# Altium PCB HTMD-PREAMP2.PcbDoc (part 2 of 2)
Units mm, origin at the board's own origin, x right, y up, seen from the top; angles counter-clockwise.
Board outline 220 x 58 mm, 8 copper layers (Top Layer, GND1, S2, POWER1, GND2, S3, POWER2, Bottom Layer); 267 components, 129 nets, 701 pads, 82 vias.
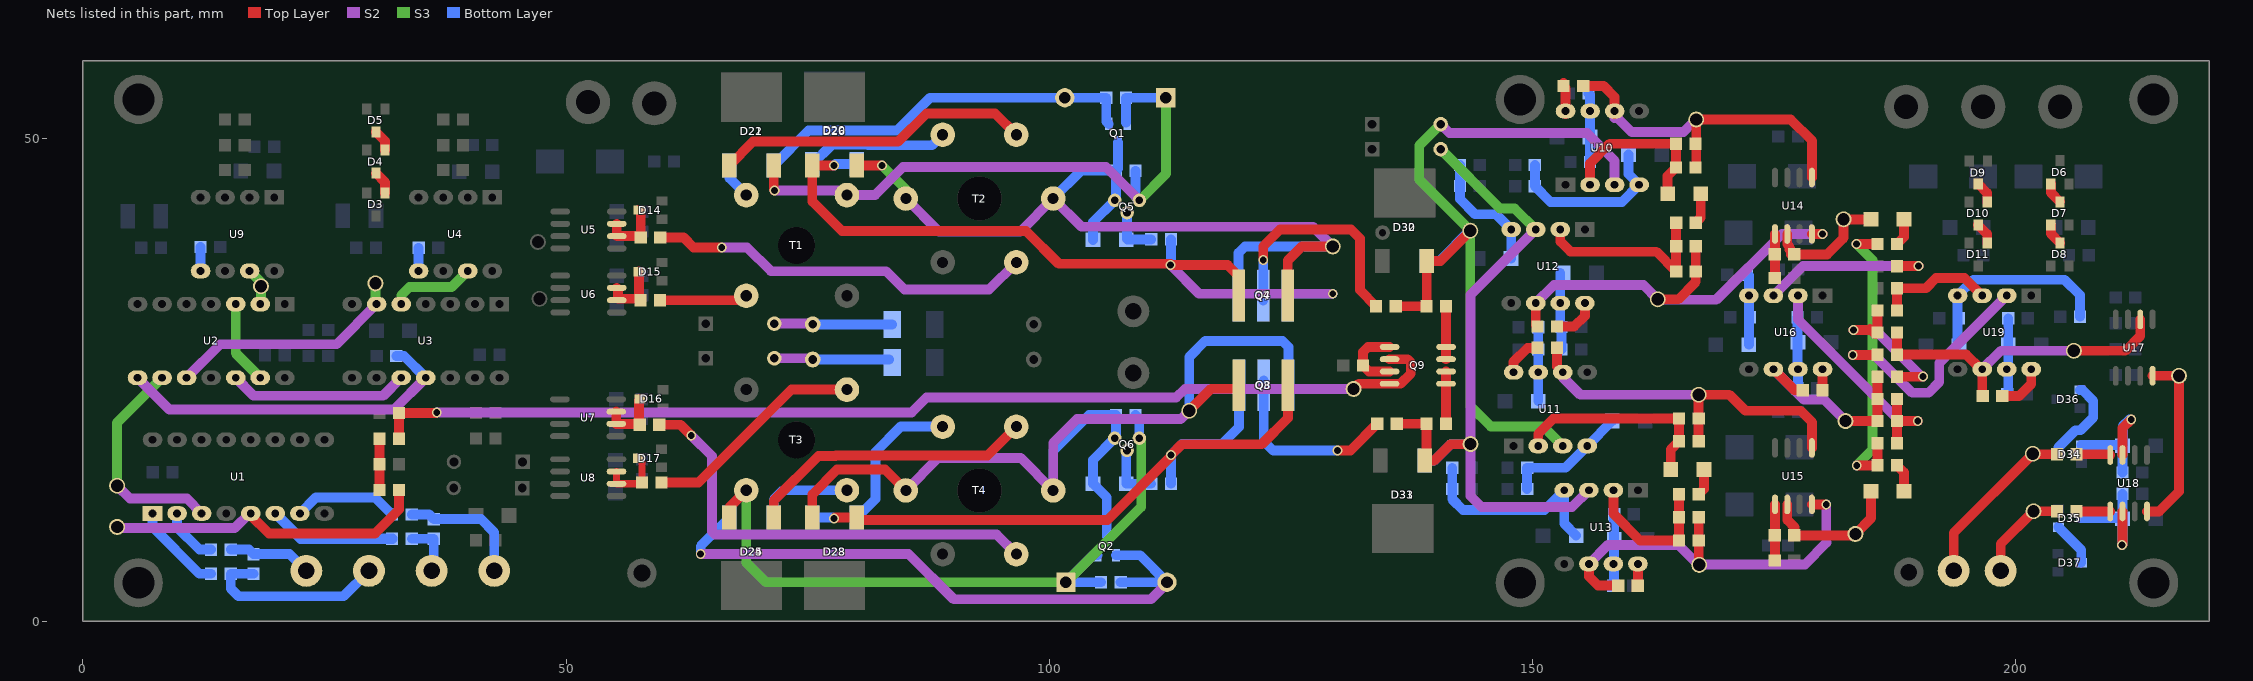
[diagram p8: the nets of this part, all layers, seen from the top]

## Via types
v1: diameter 1.016, hole 0.711, Top Layer to Bottom Layer, 81 vias
v2: diameter 1.017, hole 0.711, Top Layer to Bottom Layer, 1 vias

## Nets (pads, with @x,y where several pads share a name; then routed paths per layer and width w, separated by ;. In a path a pad name is that pad's centre, name@x,y a point inside that pad or via, vN(x,y) a via of type N, cw(c..) or ccw(c..) an arc to the next point about the centre after c; other vN are vias at no path point) (continued)
NetC34_1: C34.1 D24.2 D29.1 Q2.2 Q6.3 R26.2 T3.1 | length 73.9
  Top Layer w1.016: D24.2@66.888,10.743 66.888,11.813 T3.1@68.643,13.568
  S3 w1.016: T3.1@68.643,13.568 68.643,6.082 70.675,4.05 D29.1@101.715,4.05 109.502,11.837 109.502,18.96 Q6.3@109.31,18.96
  Bottom Layer w1.016: Q2.2@104.996,6.85 104.515,6.85 D29.1@101.715,4.05 R26.2@105.343,4.05 ; C34.1@108.925,21.35 109.31,20.965 Q6.3@109.31,18.96
NetC34_2: C34.2 C38.1 D28.2 Q2.3 Q3.3 Q6.1 Q8.3 T4.2 T4.5 TP8.1 | length 104.2
  Top Layer w1.016: D28.2@75.475,10.743 75.475,13.15 78.025,15.7 83.005,15.7 T4.5@85.155,13.55 ; TP8.1@114.475,21.8 116.75,24.075 118.842,24.075
  S2 w1.016: T4.5@85.155,13.55 88.5,16.895 97.05,16.895 T4.2@100.395,13.55 100.395,18.445 102.875,20.925 113.6,20.925 TP8.1@114.475,21.8
  Bottom Layer w1.016: T4.2@100.395,13.55 100.395,17.645 104.1,21.35 C34.2@106.893,21.35 106.893,19.083 Q6.1@106.77,18.96 104.525,16.715 C38.1@104.525,14.25 105.946,12.829 Q2.3@105.946,8.75 ; TP8.1@114.475,21.8 114.475,27.35 116.125,29 124.125,29 124.75,28.375 Q8.3@124.75,24.957
NetC35_1: C35.1 D21.2 D27.1 Q1.2 Q5.3 R25.2 T1.1 | length 64.9
  Top Layer w1.016: D21.2@71.488,47.182 71.488,44.662 v1(71.575,44.575)
  S2 w1.016: v1(71.575,44.575) 78.589,44.575 T1.1@79.057,44.107 81.982,44.107 84.875,47 105.87,47 Q5.3@109.31,43.56
  S3 w1.016: Q5.3@109.31,43.56 112.06,46.31 D27.1@112.06,54.175
  Bottom Layer w1.016: Q1.2@107.925,51.6 R25.2@107.925,54.175 D27.1@112.06,54.175 ; C35.1@108.925,46.625 108.925,43.945 Q5.3@109.31,43.56
NetC35_2: C35.2 C37.1 D26.2 Q1.3 Q4.3 Q5.1 Q7.3 T2.2 T2.5 TP7.1 | length 99.3
  Top Layer w1.016: D26.2@80.075,47.182 v1@82.668,47.182 ; Q4.3@124.665,33.225 124.665,37.34 126.118,38.793 TP7.1@129.325,38.793
  S2 w1.016: T2.5@85.155,43.75 88.555,40.35 96.995,40.35 T2.2@100.395,43.75 103.317,40.828 127.29,40.828 TP7.1@129.325,38.793
  S3 w1.016: v1(82.675,47.175) 85.155,44.695 T2.5@85.155,43.75
  Bottom Layer w1.016: T2.2@100.395,43.75 103.27,46.625 C35.2@106.893,46.625 ; C37.1@104.525,39.475 104.525,41.315 Q5.1@106.77,43.56 106.893,43.683 C35.2@106.893,46.625 ; Q1.3@107.1,49.575 107.1,46.832 C35.2@106.893,46.625 ; Q7.3@119.585,33.181 119.585,38.135 120.243,38.793 TP7.1@129.325,38.793
NetC36_1: C36.1 R27.2 R30.1 | length 5.3
  Top Layer w1.016: R27.2@30.693,13.6 C36.1@30.693,16.25 R30.1@30.693,18.9
NetC37_2: C37.2 Q5.2 R28.2 | length 5.2
  Bottom Layer w1.016: Q5.2@108.04,42.29 108.04,39.561 108.076,39.525 R28.2@110.543,39.525
NetC38_2: C38.2 Q6.2 R29.2 | length 5.9
  Bottom Layer w1.016: Q6.2@107.954,17.604 C38.2@107.954,14.25 R29.2@110.543,14.25
NetC39_1: C39.1 R37.1 | length 3.2
  Top Layer w1.016: R37.1@166.882,41.25 167.4,41.768 C39.1@167.4,44.25
NetC39_2: C39.2 C52.2 R41.2 U10.2 | length 17.5
  Top Layer w1.016: U10.2@155.945,45.175 155.945,47.395 157.975,49.425 C52.2@164.825,49.425 R41.2@164.825,46.95 163.971,46.096 C39.2@163.971,44.25
NetC40_1: C40.1 R38.1 | length 2.8
  Top Layer w1.016: R38.1@167.182,13.15 167.725,13.693 C40.1@167.725,15.725
NetC40_2: C40.2 C53.2 R42.2 U11.2 | length 22.1
  Top Layer w1.016: U11.2@150.577,18.158 150.577,19.402 152.175,21 R42.2@165.15,21 C53.2@165.15,18.65 164.296,17.796 C40.2@164.296,15.725
NetC41_2: C41.2 C42.2 R46.1 U12.4 | length 13.1
  Bottom Layer w1.016: C42.2@142.485,47.225 R46.1@142.485,45.05 142.485,43.69 144.05,42.125 146.205,42.125 U12.4@147.785,40.545 C41.2@147.785,37.56
NetC43_2: C43.2 C48.2 R47.1 U11.4 | length 13
  Bottom Layer w1.016: R47.1@149.432,13.7 C43.2@149.432,15.9 153.399,15.9 U11.4@155.657,18.158 155.665,18.158 C48.2@158.232,20.725
NetC44_2: C44.2 C45.1 R48.1 U13.4 | length 21.4
  Bottom Layer w1.016: C45.1@141.685,15.9 R48.1@141.685,13.7 141.685,12.64 142.8,11.525 151.233,11.525 U13.4@153.278,13.57 153.278,10.101 C44.2@154.504,8.875
NetC46_2: C46.2 C47.2 R45.1 U10.4 | length 18
  Bottom Layer w1.016: C46.2@150.232,47.225 R45.1@150.232,45.025 151.857,43.4 159.25,43.4 U10.4@161.025,45.175 159.921,46.279 C47.2@159.921,48.3
NetC49_1: C49.1 R37.2 R39.1 U12.2 | length 19.6
  Top Layer w1.016: U12.2@152.865,40.545 152.865,39.285 153.9,38.25 162.8,38.25 C49.1@164.85,36.2 R39.1@164.85,38.8 R37.2@164.85,41.25
NetC49_2: C49.2 C61.1 R39.2 TP15.1 U12.6 U14.8 | length 45.6
  Top Layer w1.016: C61.1@150.325,30.675 U12.6@150.325,32.925 ; TP15.1@162.95,33.325 165.075,33.325 166.882,35.132 C49.2@166.882,36.2 R39.2@166.882,38.8 ; U14.8@178.891,40.083 v1(179.992,40.083)
  S2 w1.016: U12.6@150.325,32.925 152.2,34.8 161.475,34.8 TP15.1@162.95,33.325 163,33.275 169,33.275 175.808,40.083 v1(179.992,40.083)
NetC50_1: C50.1 R38.2 R40.1 U13.2 | length 15.1
  Top Layer w1.016: U13.2@158.358,13.57 158.358,11.142 161.125,8.375 R40.1@165.15,8.375 C50.1@165.15,10.775 R38.2@165.15,13.15
NetC50_2: C50.2 C62.1 R40.2 TP14.1 U13.6 U15.8 | length 42.2
  Top Layer w1.016: U13.6@155.818,5.95 155.818,4.632 156.75,3.7 C62.1@158.853,3.7 ; TP14.1@167.182,5.9 R40.2@167.182,8.375 C50.2@167.182,10.775 ; U15.8@178.891,12.106 v1@180.294,12.106
  S2 w1.016: U13.6@155.818,5.95 157.775,7.907 165.093,7.907 167.1,5.9 178.175,5.9 180.425,8.15 180.375,8.2 v1(180.375,12.1)
NetC51_1: C51.1 C54.2 R49.1 U12.7 | length 7.8
  Bottom Layer w1.016: R49.1@152.865,30.575 U12.7@152.865,32.925 C54.2@152.865,36.05 ; C51.1@152.99,28.125 R49.1@152.99,30.45
NetC52_1: C52.1 C63.1 R41.1 TP12.1 U10.6 U14.1 | length 37.2
  Top Layer w1.016: C63.1@155.225,55.395 157.355,55.395 158.485,54.265 U10.6@158.485,52.495 ; R41.1@166.925,47.018 TP12.1@166.925,51.925 176.7,51.925 178.891,49.734 U14.1@178.891,45.925
  S2 w1.016: U10.6@158.485,52.09 U10.6@158.485,52.495 ; U10.6@158.485,52.39 160.25,50.625 165.625,50.625 TP12.1@166.925,51.925
NetC53_1: C53.1 C64.1 R42.1 TP13.1 U11.6 U15.1 | length 38.4
  Top Layer w1.016: C64.1@152.532,28.3 152.532,26.363 U11.6@153.117,25.778 ; C53.1@167.175,18.657 TP13.1@167.175,23.45 170.35,23.45 172,21.8 177.701,21.8 178.891,20.61 U15.1@178.891,17.948
  S2 w1.016: U11.6@153.117,25.778 153.117,25.258 154.925,23.45 TP13.1@167.175,23.45
NetC55_2: C55.2 C56.1 R50.1 U13.7 | length 7.3
  Bottom Layer w1.016: R50.1@158.435,3.792 C55.2@158.435,8.469 C56.1@158.435,11.094
NetC57_1: C57.1 C58.1 R43.1 U10.7 | length 7.2
  Bottom Layer w1.016: R43.1@155.777,54.625 155.945,54.457 U10.7@155.945,52.795 C57.1@155.945,50.123 155.943,50.121 C58.1@155.943,47.523
NetC59_1: C59.1 C60.1 R44.1 U11.7 | length 7.7
  Bottom Layer w1.016: C59.1@150.577,22.775 C60.1@150.577,28.125 R44.1@150.577,30.425
NetC61_2: C61.2 U12.8 | length 4.7
  Top Layer w1.016: C61.2@152.532,30.5 154.3,30.5 155.405,31.605 U12.8@155.405,32.925
NetC62_2: C62.2 U13.8 | length 2.3
  Top Layer w1.016: C62.2@160.885,3.7 160.898,3.713 U13.8@160.898,5.95
NetC63_2: C63.2 U10.8 | length 3
  Top Layer w1.016: C63.2@153.193,55.395 153.405,55.183 U10.8@153.405,52.495
NetC64_2: C64.2 U11.8 | length 4.1
  Top Layer w1.016: U11.8@148.037,25.778 148.037,26.862 149.475,28.3 C64.2@150.5,28.3
NetC73_1: C73.1 R55.1 | length 2.8
  Top Layer w1.016: R55.1@187.707,39.046 188.429,39.768 C73.1@188.429,41.596
NetC73_2: C73.2 R53.2 TP16.1 U14.6 | length 13.5
  Top Layer w1.016: U14.6@176.351,40.083 176.351,39.049 cw(c175.05,37.975) R53.2@176.69,38.367 ; R53.2@176.575,38.482 R53.2@176.69,38.367 ; R53.2@176.737,37.975 ccw(c175.05,37.975) R53.2@176.69,38.367 ; C73.2@185,41.596 182.179,41.596 182.179,39.705 182.099,39.624 182.099,39.599 180.475,37.975 R53.2@177.082,37.975 R53.2@176.69,38.367
NetC74_1: C74.1 R56.1 | length 3
  Top Layer w1.016: R56.1@187.707,16.146 188.429,15.424 C74.1@188.429,13.471
NetC74_2: C74.2 R54.2 TP23.1 U15.6 | length 15
  Top Layer w1.016: U15.6@176.351,12.106 176.351,10.474 177.082,9.743 R54.2@177.082,8.9 183.25,8.9 TP23.1@183.4,9.05 185.025,10.675 C74.2@185.025,13.446
NetC77_2: C77.2 C78.2 R57.1 U16.4 | length 7.2
  Bottom Layer w1.016: R57.1@172.373,35.775 172.373,33.305 C78.2@172.374,28.625
NetC81_1: C81.1 C83.1 C85.2 R58.2 TP19.1 U16.6 | length 21.5
  Top Layer w1.016: U16.6@174.914,26.085 177.073,23.925 C83.1@177.962,23.925 ; TP19.1@182.375,20.725 C81.1@185.675,20.726 ; C81.1@185.675,20.726 R58.2@185.675,23.016 C85.2@185.675,25.306
  S2 w1.016: U16.6@174.914,26.085 178.048,22.95 180.15,22.95 TP19.1@182.375,20.725
NetC81_2: C81.2 R58.1 R67.2 U16.2 | length 26
  Top Layer w1.016: R67.2@187.707,18.436 C81.2@187.707,20.726 ; R58.1@187.707,23.016 C81.2@187.707,20.726 ; v1(189.851,20.726) C81.2@187.707,20.726
  S2 w1.016: U16.2@177.454,33.705 177.454,31.221 187.949,20.726 v1(189.851,20.726)
NetC82_1: C82.1 C84.1 R59.1 U16.7 | length 7.2
  Bottom Layer w1.016: U16.7@177.4,26.138 C82.1@177.4,31.475 ; R59.1@177.454,24.179 U16.7@177.454,26.085
NetC83_2: C83.2 U16.8 | length 2.2
  Top Layer w1.016: C83.2@179.994,23.925 U16.8@179.994,26.085
NetC85_1: C85.1 C97.1 R72.1 | length 17
  Top Layer w1.016: v1(183.2,30.15) 184.836,30.15 184.938,30.251 185.489,29.7 R72.1@185.675,29.886 C97.1@185.675,32.176 ; C85.1@187.707,25.306 190.356,25.306 v1(190.4,25.35)
  S2 w1.016: v1(183.2,30.15) 185.45,30.15 190.25,25.35 v1(190.4,25.35)
NetC86_2: C86.2 C87.2 R61.1 U19.4 | length 21.3
  Bottom Layer w1.016: C87.2@193.974,28.671 U19.4@193.974,33.705 195.619,35.35 205.05,35.35 206.625,33.775 R61.1@206.625,31.525
NetC88_1: C88.1 C89.1 D34.2 U18.3 | length 14.4
  Top Layer w1.016: U18.3@211.033,17.216 211.033,19.999 v1(211.935,20.901)
  Bottom Layer w1.016: D34.2@206.775,18.246 C88.1@211.082,18.246 ; C89.1@211.033,15.396 C88.1@211.033,18.171 211.095,18.232 211.095,20.245 211.751,20.901 v1(211.935,20.901)
NetC90_2: C90.2 C91.1 D35.3 U18.6 | length 13
  Top Layer w1.016: v1(210.975,7.9) 211.033,7.958 U18.6@211.033,11.374
  Bottom Layer w1.016: D35.3@206.775,10.696 210.958,10.696 C91.1@211.033,10.621 ; v1@211.033,7.958 C91.1@211.033,10.621 ; C90.2@211.033,13.196 C91.1@211.033,10.621
NetC93_1: C93.1 C95.1 R65.1 U19.7 | length 7.8
  Bottom Layer w1.016: R65.1@199.204,23.596 C95.1@199.204,28.596 C93.1@199.204,31.371
NetC94_2: C94.2 U19.8 | length 5
  Top Layer w1.016: C94.2@198.596,23.321 200.346,23.321 201.594,24.569 U19.8@201.594,26.085
NetC97_2: C97.2 R71.2 U19.3 | length 12.3
  Top Layer w1.016: C97.2@187.707,32.176 R71.2@187.707,34.466 190.691,34.466 191.75,35.525 194.693,35.525 U19.3@196.514,33.705
NetD1_1: D1.1 R5.2 R7.2 | length 11.8
  S2 w1.016: D1.1@71.551,27.226 R5.2@75.399,27.226
  Bottom Layer w1.016: R5.2@75.525,27.1 R7.2@83.44,27.1
NetD2_1: D2.1 R6.2 R8.2 | length 12.1
  S2 w1.016: D2.1@71.551,30.805 R6.2@75.449,30.805
  Bottom Layer w1.016: R6.2@75.525,30.729 R8.2@83.74,30.729
NetD3_2: D3.2 D4.3 | length 2.4
  Top Layer w1.016: D4.3@30.329,46.375 31.269,45.435 D3.2@31.269,44.338
NetD4_2: D4.2 D5.3 | length 2.3
  Top Layer w1.016: D5.3@30.329,50.637 31.269,49.698 D4.2@31.269,48.762
NetD6_2: D6.2 D7.3 | length 2.3
  Top Layer w1.016: D6.2@203.62,45.275 203.62,44.352 D7.3@204.56,43.413
NetD7_2: D7.2 D8.3 | length 2.3
  Top Layer w1.016: D7.2@203.62,41.025 203.62,40.102 D8.3@204.56,39.163
NetD9_3: D9.3 D10.2 | length 2.2
  Top Layer w1.016: D9.3@196.115,45.25 197.03,44.335 D10.2@197.03,43.4
NetD10_3: D10.3 D11.2 | length 2.2
  Top Layer w1.016: D10.3@196.09,41.013 197.03,40.073 D11.2@197.03,39.163
NetD14_3: D14.3 R19.1 U5.6 U5.7 | length 6.7
  Top Layer w1.016: U5.7@55.242,41.13 U5.6@55.242,39.86 57.583,39.86 R19.1@57.718,39.725 57.718,42.38 D14.3@57.537,42.56
NetD15_3: D15.3 R20.1 U6.6 U6.7 | length 6.1
  Top Layer w1.016: U6.7@55.242,34.505 55.388,34.359 55.388,33.381 57.537,33.381 D15.3@57.537,36.185
NetD16_3: D16.3 R21.1 U7.6 U7.7 | length 6.2
  Top Layer w1.016: U7.7@55.192,21.705 U7.6@55.192,20.435 57.533,20.435 57.533,22.881 D16.3@57.662,23.01
NetD17_3: D17.3 R22.1 U8.6 U8.7 | length 6.6
  Top Layer w0.762: U8.7@55.217,15.505 U8.6@55.217,14.235 57.71,14.235 R22.1@57.85,14.375 57.85,16.523 D17.3@57.487,16.885
NetD18_1: D18.1 D30.1 D32.2 R31.2 R35.1 TP11.1 U10.3 U11.3 | length 85.2
  Top Layer w1.016: R31.2@135.832,32.6 R35.1@139.01,32.6 139.052,32.642 D32.2@139.052,37.28 140.455,37.28 TP11.1@143.65,40.475
  S2 w1.016: D18.1@140.491,51.451 141.417,50.525 155.625,50.525 158.485,47.665 U10.3@158.485,45.175
  S3 w1.016: D18.1@140.491,51.451 138.275,49.235 138.275,45.7 TP11.1@143.55,40.425 143.55,22.3 145.675,20.175 151.1,20.175 U11.3@153.117,18.158
  Bottom Layer w1.016: D30.1@139.052,37.28 140.355,37.28 TP11.1@143.55,40.475
NetD19_1: D19.1 D31.1 D33.2 R32.1 R34.2 TP10.1 U12.3 U13.3 | length 74.8
  Top Layer w1.016: R32.1@135.95,20.45 R34.2@139.01,20.45 139.01,16.806 D31.1@138.852,16.648 139.823,16.648 141.5,18.325 TP10.1@143.55,18.325
  S2 w1.016: U12.3@150.325,40.545 143.575,33.795 TP10.1@143.575,18.35 143.575,12.975 144.725,11.825 154.073,11.825 U13.3@155.818,13.57
  S3 w1.016: D19.1@140.491,48.851 146.617,42.725 148.145,42.725 U12.3@150.325,40.545
  Bottom Layer w1.016: D33.2@138.852,16.648 139.823,16.648 141.5,18.325 TP10.1@143.55,18.325
NetD20_1: D20.1 D26.1 Q4.1 Q7.1 R28.1 | length 82.5
  Top Layer w1.016: v1@77.718,47.182 D26.1@75.475,47.182 75.475,43.45 78.55,40.375 97.6,40.375 100.975,37 v1@112.525,37 ; v1(112.525,36.875) 118.45,36.875 119.585,35.74 Q4.1@119.585,33.725
  S2 w1.016: v1(112.525,36.875) 115.5,33.9 v1(129.325,33.9)
  Bottom Layer w1.016: v1@77.857,47.307 D20.1@80.075,47.307 ; v1@112.575,36.925 R28.1@112.575,39.525 ; Q7.1@124.884,33.9 v1(129.325,33.9)
  other v1: 77.725,47.175
NetD20_2: D20.2 T2.4 | length 14.8
  Bottom Layer w1.016: D20.2@75.475,47.307 77.487,49.319 81.141,49.319 81.203,49.257 87.873,49.257 T2.4@88.965,50.349
NetD21_1: D21.1 T2.3 | length 32.8
  Top Layer w1.016: D21.1@66.888,47.182 69.35,49.645 84.37,49.645 87.275,52.55 94.384,52.55 T2.3@96.585,50.349
NetD22_1: D22.1 D27.2 Q1.1 R25.1 | length 40.1
  Bottom Layer w1.016: D22.1@71.488,47.182 75.08,50.775 84.25,50.775 87.65,54.175 D27.2@101.6,54.175 R25.1@105.893,54.175 105.893,51.732 Q1.1@106.15,51.475
NetD22_2: D22.2 T1.2 | length 3.8
  Bottom Layer w1.016: D22.2@66.888,47.182 66.888,45.862 T1.2@68.643,44.107
NetD23_1: D23.1 D28.1 Q3.1 Q8.1 R29.1 | length 73
  Top Layer w1.016: v1@77.818,10.743 D28.1@80.075,10.743 80.075,10.502 106.002,10.502 v1@112.663,17.163 ; v1(112.6,17.225) 113.7,18.325 121.975,18.325 124.7,21.05 Q3.1@124.7,24.884
  Bottom Layer w1.016: D23.1@75.475,10.743 v1@77.632,10.743 ; R29.1@112.575,14.25 v1@112.575,17.2 ; v1(112.6,17.225) 113.725,18.35 117.875,18.35 119.635,20.11 Q8.1@119.635,24.443
  other v1: 77.725,10.65
NetD23_2: D23.2 T4.4 | length 15.6
  Bottom Layer w1.016: D23.2@80.075,10.743 82,12.668 82,17.525 84.624,20.149 T4.4@88.965,20.149
NetD24_1: D24.1 T4.3 | length 30
  Top Layer w1.016: D24.1@71.488,10.743 71.488,12.488 76.125,17.125 77.869,17.125 77.919,17.175 93.611,17.175 T4.3@96.585,20.149
NetD25_1: D25.1 D29.2 Q2.1 R26.1 | length 67.2
  S2 w1.016: v1(63.925,6.975) 85.425,6.975 90.112,2.288 110.512,2.288 112.175,3.951 D29.2@112.175,4.05
  Bottom Layer w1.016: v1(63.925,6.975) 63.925,7.781 D25.1@66.888,10.743 ; Q2.1@106.896,6.85 109.375,6.85 D29.2@112.175,4.05 R26.1@107.375,4.05
NetD25_2: D25.2 T3.2 | length 9.8
  Bottom Layer w1.016: D25.2@71.488,10.743 71.488,12.588 72.468,13.568 T3.2@79.057,13.568
NetD34_3: D34.3 D36.2 | length 9.1
  Bottom Layer w1.016: D34.3@204.387,17.306 204.387,17.99 206.173,19.775 206.675,19.775 208.007,21.107 208.007,22.8 206.877,23.93 D36.2@206.625,23.93
NetD35_2: D35.2 D37.3 | length 4.7
  Bottom Layer w1.016: D35.2@204.387,9.756 206.763,7.381 D37.3@206.763,6.06
NetQ7_2: Q7.2 R31.1 | length 24.4
  Top Layer w1.016: v1(122.125,37.375) 122.125,38.8 123.875,40.55 131.2,40.55 132.125,39.625 132.125,34.275 R31.1@133.8,32.6
  Bottom Layer w1.016: Q7.2@122.125,33.181 v1(122.125,37.375)
NetQ8_2: Q8.2 R32.2 | length 19.6
  Top Layer w1.016: v1(129.8,17.675) 131.143,17.675 R32.2@133.918,20.45
  Bottom Layer w1.016: Q8.2@122.175,24.944 122.175,18.675 123.2,17.65 123.225,17.675 v1(129.8,17.675)
NetQ9_1: Q9.1 Q9.3 R36.1 | length 7.4
  Top Layer w1.016: Q9.3@135.2,25.86 133.065,25.86 R36.1@132.45,26.475 132.45,27.875 132.975,28.4 Q9.1@135.2,28.4
NetQ9_2: Q9.2 Q9.4 R30.2 R33.2 TP9.1 | length 112.4
  Top Layer w1.016: R30.2@32.725,18.9 R33.2@32.725,21.55 v1@36.55,21.55 ; TP9.1@131.475,24.05 132.015,24.59 Q9.4@135.2,24.59 136.34,24.59 137.4,25.65 137.4,26.8 137.07,27.13 Q9.2@135.2,27.13
  S2 w1.016: v1(36.625,21.625) 36.645,21.605 85.755,21.605 87.3,23.15 113.125,23.15 114.025,24.05 TP9.1@131.475,24.05
NetQ9_5: Q9.5 Q9.6 R34.1 | length 5.4
  Top Layer w1.016: R34.1@141.042,20.45 Q9.5@141.042,24.59 Q9.6@141.042,25.86
NetQ9_7: Q9.7 Q9.8 R35.2 | length 5.5
  Top Layer w1.016: Q9.7@141.042,27.13 R35.2@141.042,32.6
NetR1_2: R1.2 U1.2 | length 5.9
  Bottom Layer w1.016: U1.2@9.755,11.175 9.755,9.745 12.075,7.425 R1.2@13.273,7.425
NetR2_2: R2.2 U1.1 | length 9.5
  Bottom Layer w1.016: U1.1@7.215,11.175 7.215,9.79 12.08,4.925 R2.2@13.273,4.925
NetR3_2: R3.2 U1.6 | length 13.2
  Bottom Layer w1.106: U1.6@19.915,11.175 22.54,8.55 R3.2@32,8.55
NetR4_2: R4.2 U1.7 | length 11
  Bottom Layer w1.016: U1.7@22.455,11.175 24.1,12.82 30.23,12.82 R4.2@32,11.05
NetR9_2: R9.2 U2.8 U3.11 | length 36.5
  S2 w1.016: U2.8@5.66,25.206 8.941,21.925 32.2,21.925 U3.11@35.48,25.206
  Bottom Layer w1.016: R9.2@32.432,27.451 33.235,27.451 U3.11@35.48,25.206
NetR13_1: R13.1 U4.5 | length 2.4
  Bottom Layer w1.016: U4.5@34.747,36.255 R13.1@34.747,38.65
NetR17_1: R17.1 U9.5 | length 2.5
  Bottom Layer w1.016: U9.5@12.18,36.255 R17.1@12.18,38.725
NetR19_2: R19.2 T2.1 | length 40.2
  Top Layer w1.016: R19.2@59.75,39.725 62.175,39.725 63.2,38.7 v1(66.1,38.7)
  S2 w1.016: v1(66.1,38.7) 68.716,38.7 71.183,36.233 83.117,36.233 85.025,34.325 93.759,34.325 T2.1@96.585,37.151
NetR20_2: R20.2 T1.3 | length 9.1
  Top Layer w1.016: R20.2@59.725,33.225 68.175,33.225 T1.3@68.643,33.693
NetR21_2: R21.2 T4.1 | length 47.1
  Top Layer w1.016: R21.2@59.65,20.35 61.85,20.35 v1(62.95,19.25)
  S2 w1.016: v1(62.95,19.25) 65.1,17.1 65.1,9.3 65.417,8.983 94.553,8.983 T4.1@96.585,6.951
NetR22_2: R22.2 T3.3 | length 23.2
  Top Layer w1.016: R22.2@59.882,14.375 63.7,14.375 73.307,23.982 T3.3@79.057,23.982
NetR27_1: R27.1 TP2.1 U1.5 | length 34
  Top Layer w1.016: U1.5@17.375,11.175 17.375,10.975 19.25,9.1 30.25,9.1 32.725,11.575 R27.1@32.725,13.6
  S2 w1.016: TP2.1@3.55,9.774 3.55,9.651 15.72,9.651 17.244,11.175 U1.5@17.375,11.175
NetR51_1: R51.1 R53.1 U14.5 | length 4.5
  Top Layer w1.016: R51.1@175.081,35.556 U14.5@175.081,40.083
NetR52_1: R52.1 R54.1 U15.5 | length 5.8
  Top Layer w1.016: R52.1@175.081,6.331 U15.5@175.081,12.106
NetR55_2: R55.2 R56.2 R67.1 | length 30.9
  Top Layer w1.016: v1(183.496,39.046) R55.2@185.675,39.046 ; v1(183.529,16.146) R56.2@185.675,16.146 R67.1@185.675,18.436
  S3 w1.016: v1(183.496,39.046) 185.166,37.375 185.166,17.782 v1(183.529,16.146)
NetR62_1: R62.1 U19.2 | length 25.5
  Top Layer w1.016: v1(183.125,27.575) 185.454,27.575 185.554,27.475 R62.1@185.675,27.596
  S2 w1.016: v1(183.125,27.575) 185.35,27.575 189.275,23.65 190.95,23.65 192.075,24.775 192.075,26.726 U19.2@199.054,33.705
NetR63_1: R63.1 U18.4 | length 3.5
  Top Layer w1.016: R63.1@206.275,17.291 209.688,17.291 U18.4@209.763,17.216
NetR64_1: R64.1 U18.5 | length 3.5
  Top Layer w1.016: R64.1@206.297,11.374 U18.5@209.763,11.374
NetR69_1: R69.1 U16.3 | length 18.5
  Top Layer w1.016: R69.1@187.707,36.756 v1(189.919,36.756)
  S2 w1.016: U16.3@174.914,33.705 177.965,36.756 v1(189.919,36.756)
NetTP1_1: TP1.1 U1.3 U2.9 | length 23
  S2 w1.016: TP1.1@3.55,14.037 4.888,12.699 10.771,12.699 U1.3@12.295,11.175
  S3 w1.016: TP1.1@3.55,14.037 3.55,20.555 U2.9@8.2,25.206
NetTP18_1: TP18.1 U17.8 U18.8 | length 18.9
  Top Layer w1.016: U18.8@213.573,11.374 214.824,11.374 216.875,13.425 TP18.1@216.875,25.407 U17.8@214.137,25.407
NetU2_3: U2.3 U2.13 | length 8.7
  S3 w1.016: U2.3@15.82,32.826 15.82,27.746 U2.13@18.36,25.206
NetU2_12: U2.12 U3.10 | length 18.7
  S2 w1.016: U2.12@15.82,25.206 17.676,23.35 31.085,23.35 U3.10@32.94,25.206
NetU3_5: U3.5 U4.7 | length 8.8
  S3 w1.016: U3.5@32.94,32.826 32.94,33.735 33.806,34.6 38.172,34.6 U4.7@39.827,36.255
PREAMPECHO+: E12.1 R63.2 TP20.1 | length 18
  Top Layer w1.016: E12.1@193.563,5.225 193.563,9.159 TP20.1@201.75,17.346 ; TP20.1@201.805,17.291 R63.2@204.243,17.291
PREAMPECHO-: E13.1 R64.2 TP21.1 | length 10
  Top Layer w1.016: E13.1@198.425,5.225 198.425,7.996 TP21.1@201.825,11.396 R64.2@204.243,11.396
PRJ: TP3.1 U2.10 U3.6 | length 24.8
  S2 w1.016: U2.10@10.74,25.206 14.2,28.665 26.24,28.665 U3.6@30.4,32.826
  S3 w1.016: U3.6@30.275,32.951 TP3.1@30.275,34.975
RT_SW+: C1.2 E1.1 R1.1 | length 8.7
  Bottom Layer w1.016: R1.1@15.305,7.425 17.187,7.425 C1.2@17.655,6.957 21.398,6.957 E1.1@23.13,5.225
RT_SW-: C1.1 E2.1 R2.1 | length 19.6
  Bottom Layer w1.016: C1.1@17.655,4.925 R2.1@15.305,4.925 15.305,3.405 16.11,2.6 26.984,2.6 E2.1@29.609,5.225
SIGNAL: C94.1 R62.2 R72.2 TP17.1 U17.2 U19.6 | length 33.9
  Top Layer w1.016: R62.2@187.707,27.596 R62.2@187.707,27.609 ; R72.2@187.707,29.886 R62.2@187.707,27.609 ; C94.1@196.514,23.371 U19.6@196.514,26.085 196.383,26.085 194.859,27.609 R62.2@187.707,27.609 ; TP17.1@206,27.996 211.321,27.996 212.867,29.542 U17.2@212.867,31.249
  S2 w1.016: U19.6@196.514,26.085 198.425,27.996 TP17.1@206,27.996
SOFTDUMP+: C2.2 E3.1 R3.1 | length 5.7
  Bottom Layer w1.016: R3.1@34.032,8.55 C2.2@36.312,8.55 36.312,5.45 E3.1@36.087,5.225
SOFTDUMP-: C2.1 E4.1 R4.1 | length 13.3
  Bottom Layer w1.016: R4.1@34.032,11.05 35.844,11.05 C2.1@36.312,10.582 41.193,10.582 42.566,9.209 E4.1@42.566,5.225
UNEXPECT_HV: TP6.1 U2.2 U9.7 | length 3.9
  S3 w1.016: U9.7@17.26,36.255 18.425,35.09 TP6.1@18.425,34.675 18.425,32.89 U2.2@18.36,32.826
pads on no net: D3.1 D4.1 D5.1 D6.1 D7.1 D8.1 D9.1 D10.1 D11.1 D14.1 D15.1 D16.1 D17.1 D20.0 D21.0 D22.0 D23.0 D24.0 D25.0 D26.0 D28.0 D30.0 D31.0 D32.0 D33.0 D34.1 D35.1 D36.1 D37.1 T1.0 T2.0 T3.0 T4.0 U1.9 U1.10 U1.11 U1.13 U1.14 U1.15 U2.6 U3.2 U3.4 U3.12 U5.3 U6.3 U7.3 U8.3 U10.1 U10.5 U11.1 U11.5 U12.1 U12.5 U13.1 U13.5 U16.1 U16.5 U18.7 U19.1 U19.5

## Polygon pours and split planes (outlines as drawn)
AGND on GND1 (split plane): 219.49,0.51 111.102,0.51 111.102,21.614 111.105,21.618 111.157,21.703 111.195,21.795 111.219,21.892 111.227,21.992 111.219,22.092 111.195,22.189 111.157,22.281 111.105,22.366 111.04,22.442 109.973,23.509 109.897,23.574 109.812,23.626 109.72,23.665 109.622,23.688 109.523,23.696 99.474,23.696 96.826,26.322 96.826,31.309 99.634,34.233 109.624,34.233 109.661,34.236 109.698,34.237 109.711,34.24 109.724,34.241 109.76,34.249 109.796,34.256 109.808,34.261 109.821,34.264 109.855,34.278 109.89,34.291 109.901,34.297 109.914,34.302 109.945,34.322 109.977,34.339 109.988,34.348 109.999,34.354 110.027,34.378 110.056,34.401 110.065,34.411 110.075,34.419 110.099,34.447 110.124,34.474 110.638,35.124 110.661,35.129 110.754,35.167 110.839,35.22 110.915,35.285 110.98,35.361 111.032,35.446 111.07,35.538 111.094,35.635 111.1,35.709 111.145,35.777 111.187,35.867 111.214,35.963 111.226,36.063 111.222,36.163 111.203,36.261 111.169,36.354 111.12,36.442 111.102,36.465 111.102,57.49 219.49,57.49
DGND on GND1 (split plane): 109.828,36.153 109.316,35.507 99.363,35.507 99.356,35.506 99.35,35.507 99.307,35.502 99.263,35.499 99.257,35.497 99.25,35.497 99.208,35.486 99.166,35.476 99.16,35.473 99.154,35.471 99.114,35.454 99.074,35.437 99.068,35.434 99.062,35.431 99.026,35.408 98.988,35.385 98.983,35.381 98.978,35.377 98.946,35.348 98.912,35.32 98.908,35.315 98.903,35.311 96.108,32.4 96.09,32.399 95.993,32.375 95.9,32.337 95.815,32.285 95.739,32.22 95.674,32.144 95.622,32.059 95.584,31.966 95.56,31.869 95.552,31.769 95.552,26.181 95.56,26.082 95.58,26.001 95.586,25.929 95.609,25.832 95.648,25.74 95.701,25.655 95.766,25.579 98.814,22.557 98.89,22.492 98.976,22.44 99.068,22.402 99.165,22.379 99.265,22.372 99.365,22.38 99.462,22.404 99.505,22.422 109.259,22.422 109.828,21.853 109.828,0.51 0.51,0.51 0.51,57.49 109.828,57.49
+8V on POWER1 (split plane): 219.49,0.51 111.102,0.51 111.102,21.871 111.119,21.942 111.127,22.042 111.119,22.142 111.095,22.239 111.057,22.331 111.005,22.416 110.94,22.492 109.873,23.559 109.797,23.624 109.712,23.676 109.62,23.715 109.522,23.738 109.423,23.746 99.549,23.746 96.826,26.446 96.826,31.463 99.534,34.283 109.524,34.283 109.624,34.291 109.721,34.314 109.814,34.352 109.899,34.404 109.975,34.469 110.626,35.121 110.661,35.129 110.754,35.167 110.839,35.22 110.915,35.285 110.98,35.361 111.032,35.446 111.07,35.538 111.094,35.635 111.099,35.704 111.119,35.785 111.127,35.885 111.119,35.985 111.102,36.056 111.102,57.49 219.49,57.49
+5D on POWER1 (split plane): 109.828,36.124 109.261,35.557 99.263,35.557 99.256,35.556 99.25,35.557 99.207,35.552 99.163,35.549 99.157,35.547 99.15,35.547 99.108,35.536 99.066,35.526 99.06,35.523 99.054,35.521 99.014,35.504 98.974,35.487 98.968,35.484 98.962,35.481 98.926,35.458 98.888,35.435 98.883,35.431 98.878,35.427 98.846,35.398 98.812,35.37 98.808,35.365 98.803,35.361 95.73,32.161 95.702,32.127 95.674,32.094 95.671,32.088 95.667,32.083 95.645,32.046 95.622,32.009 95.619,32.003 95.616,31.997 95.6,31.957 95.584,31.916 95.582,31.91 95.58,31.904 95.57,31.861 95.56,31.819 95.56,31.813 95.558,31.806 95.556,31.763 95.552,31.719 95.552,26.131 95.56,26.032 95.584,25.935 95.622,25.842 95.674,25.757 95.739,25.681 95.815,25.616 95.9,25.564 95.911,25.559 98.667,22.827 98.67,22.82 98.722,22.734 98.787,22.658 98.863,22.593 98.948,22.541 99.005,22.518 99.051,22.49 99.143,22.452 99.24,22.429 99.34,22.422 99.44,22.43 99.537,22.454 99.58,22.472 109.159,22.472 109.828,21.803 109.828,0.51 0.51,0.51 0.51,57.49 109.828,57.49
AGND on GND2 (split plane): 219.49,0.51 111.102,0.51 111.102,21.821 111.119,21.892 111.127,21.992 111.119,22.092 111.095,22.189 111.057,22.281 111.005,22.366 110.94,22.442 109.873,23.509 109.797,23.574 109.712,23.626 109.62,23.665 109.522,23.688 109.423,23.696 99.55,23.696 96.876,26.347 96.876,27.907 96.906,27.978 96.929,28.075 96.937,28.175 96.937,31.643 99.527,34.233 109.524,34.233 109.624,34.241 109.721,34.264 109.814,34.302 109.899,34.354 109.975,34.419 110.701,35.146 110.754,35.167 110.839,35.22 110.915,35.285 110.98,35.361 111.032,35.446 111.07,35.538 111.093,35.632 111.095,35.638 111.119,35.735 111.127,35.835 111.119,35.935 111.102,36.006 111.102,57.49 219.49,57.49
DGND on GND2 (split plane): 109.828,36.074 109.261,35.507 99.263,35.507 99.163,35.499 99.066,35.476 98.974,35.437 98.888,35.385 98.812,35.32 95.85,32.357 95.785,32.281 95.732,32.196 95.694,32.104 95.671,32.007 95.663,31.907 95.663,28.382 95.634,28.311 95.61,28.214 95.602,28.114 95.602,26.324 95.583,26.276 95.56,26.178 95.552,26.079 95.561,25.979 95.584,25.882 95.623,25.79 95.676,25.705 95.741,25.629 98.789,22.607 98.826,22.575 98.863,22.543 98.864,22.543 98.865,22.542 98.907,22.517 98.948,22.491 98.949,22.491 98.951,22.49 98.995,22.472 99.041,22.453 99.042,22.453 99.043,22.452 99.09,22.441 99.138,22.43 99.139,22.43 99.14,22.429 99.189,22.426 99.237,22.422 109.159,22.422 109.828,21.753 109.828,0.51 0.51,0.51 0.51,57.49 109.828,57.49
-8V on POWER2 (split plane): 219.49,0.51 111.102,0.51 111.102,22.042 111.094,22.142 111.07,22.239 111.032,22.331 110.98,22.416 110.915,22.492 109.923,23.484 109.847,23.549 109.762,23.601 109.67,23.64 109.572,23.663 109.473,23.671 99.551,23.671 96.766,26.456 96.766,31.273 99.584,34.208 109.574,34.208 109.674,34.216 109.771,34.239 109.864,34.277 109.949,34.329 110.025,34.394 110.99,35.36 111.055,35.436 111.107,35.521 111.145,35.613 111.169,35.71 111.177,35.81 111.169,35.91 111.145,36.007 111.107,36.099 111.102,36.108 111.102,57.49 219.49,57.49
+5D on POWER2 (split plane): 109.828,35.999 109.311,35.482 99.313,35.482 99.306,35.481 99.3,35.482 99.257,35.477 99.213,35.474 99.207,35.472 99.2,35.472 99.158,35.461 99.116,35.451 99.11,35.448 99.104,35.446 99.064,35.429 99.024,35.412 99.018,35.409 99.012,35.406 98.976,35.383 98.938,35.36 98.933,35.356 98.928,35.352 98.896,35.323 98.862,35.295 98.858,35.29 98.853,35.286 95.669,31.97 95.642,31.937 95.613,31.903 95.61,31.898 95.606,31.893 95.584,31.855 95.561,31.818 95.559,31.812 95.555,31.807 95.54,31.766 95.523,31.726 95.521,31.72 95.519,31.714 95.51,31.671 95.499,31.629 95.499,31.622 95.498,31.616 95.495,31.572 95.492,31.529 95.492,26.193 95.499,26.093 95.523,25.996 95.561,25.903 95.613,25.818 95.678,25.742 98.837,22.583 98.913,22.518 98.998,22.466 99.091,22.428 99.188,22.405 99.287,22.397 109.209,22.397 109.828,21.778 109.828,0.51 0.51,0.51 0.51,57.49 109.828,57.49

## Keep-outs
Keep-Out Layer:
  the board outline again, w0.254

## Other copper
GND1 (plane layer: these items are gaps in the copper):
  lines w1.27: 96.189,26.181 96.189,31.769 ; 96.214,26.031 99.262,23.009 ; 96.289,31.669 99.363,34.87 109.624,34.87 110.59,36.089 ; 99.337,23.059 109.523,23.059 110.59,21.992 ; 110.465,0 110.465,21.892 ; 110.465,35.735 110.465,58
POWER1 (plane layer: these items are gaps in the copper):
  lines w1.27: 96.189,26.131 96.189,31.719 99.263,34.92 109.524,34.92 110.49,35.885 ; 96.289,26.081 99.337,23.059 ; 99.237,23.109 109.423,23.109 110.49,22.042 ; 110.465,0 110.465,21.892 ; 110.465,35.735 110.465,58
GND2 (plane layer: these items are gaps in the copper):
  lines w1.27: 96.189,26.081 99.237,23.059 109.423,23.059 110.49,21.992 ; 96.214,26.106 99.262,23.084 ; 96.239,26.106 96.239,28.114 96.3,28.175 96.3,31.907 99.263,34.87 109.524,34.87 110.49,35.835 ; 110.465,0 110.465,21.892 ; 110.465,35.735 110.465,58
POWER2 (plane layer: these items are gaps in the copper):
  lines w1.27: 110.465,0 110.465,22.042 109.473,23.034 99.287,23.034 96.129,26.193 96.129,31.529 99.313,34.845 109.574,34.845 110.54,35.81 ; 110.465,35.735 110.465,58

## Silkscreen, mask and mechanical layers (free items; w line width, h text height)
Top Overlay:
  text "HTMD-PREAMP-20201104byLZP" at 178.55,1.375 h1.27
Mechanical 1:
  lines w0.254: 0,0 220,0 220,58 219.175,58 0,58 0,0

## Text inside footprints (layer, text, board x,y; h text height)
Q3: Top Overlay "1" at 125.823,23.487 h1.52; Top Overlay "3" at 117.448,23.587 h1.52
Q4: Top Overlay "1" at 117.861,33.182 h1.52; Top Overlay "3" at 125.911,33.132 h1.52
Q5: Top Overlay "2" at 107.79,44.487 h0.76; Top Overlay "1" at 106.647,44.487 h0.76; Top Overlay "3" at 109.187,44.487 h0.76
Q6: Top Overlay "1" at 106.647,19.887 h0.76; Top Overlay "2" at 107.79,19.887 h0.76; Top Overlay "3" at 109.187,19.887 h0.76
Q7: Bottom Overlay "1" at 127.078,34.705 h1.52 r90; Bottom Overlay "3" at 118.569,35.213 h1.52 r90
Q8: Bottom Overlay "1" at 117.222,23.42 h1.52 r270; Bottom Overlay "3" at 125.731,22.912 h1.52 r270
T1: Top Overlay "YEL" at 78.275,41.2 h0.76; Top Overlay "BRN" at 78.125,35.55 h0.76; Top Overlay "ORG" at 67.825,41.475 h0.76; Top Overlay "RED" at 67.7,35.525 h0.76
T2: Top Overlay "GRN" at 97.3,48.183 h0.76; Top Overlay "BLU" at 99.075,41.208 h0.76; Top Overlay "YEL" at 90.55,50.008 h0.76; Top Overlay "BRN" at 97.275,38.583 h0.76; Top Overlay "ORG" at 85.025,45.558 h0.76; Top Overlay "RED" at 86.25,38.958 h0.76
T3: Top Overlay "RED" at 78.225,21.425 h0.76; Top Overlay "ORG" at 78.175,15.225 h0.76; Top Overlay "BRN" at 67.5,21.442 h0.76; Top Overlay "YEL" at 67.5,15.092 h0.76
T4: Top Overlay "GRN" at 97.316,17.892 h0.76; Top Overlay "BLU" at 98.441,10.967 h0.76; Top Overlay "YEL" at 86.716,17.767 h0.76; Top Overlay "BRN" at 93.116,5.692 h0.76; Top Overlay "ORG" at 84.205,15.128 h0.76; Top Overlay "RED" at 85.566,8.017 h0.76